# EAGLE board Breakout (EAGLE 7.4.0)
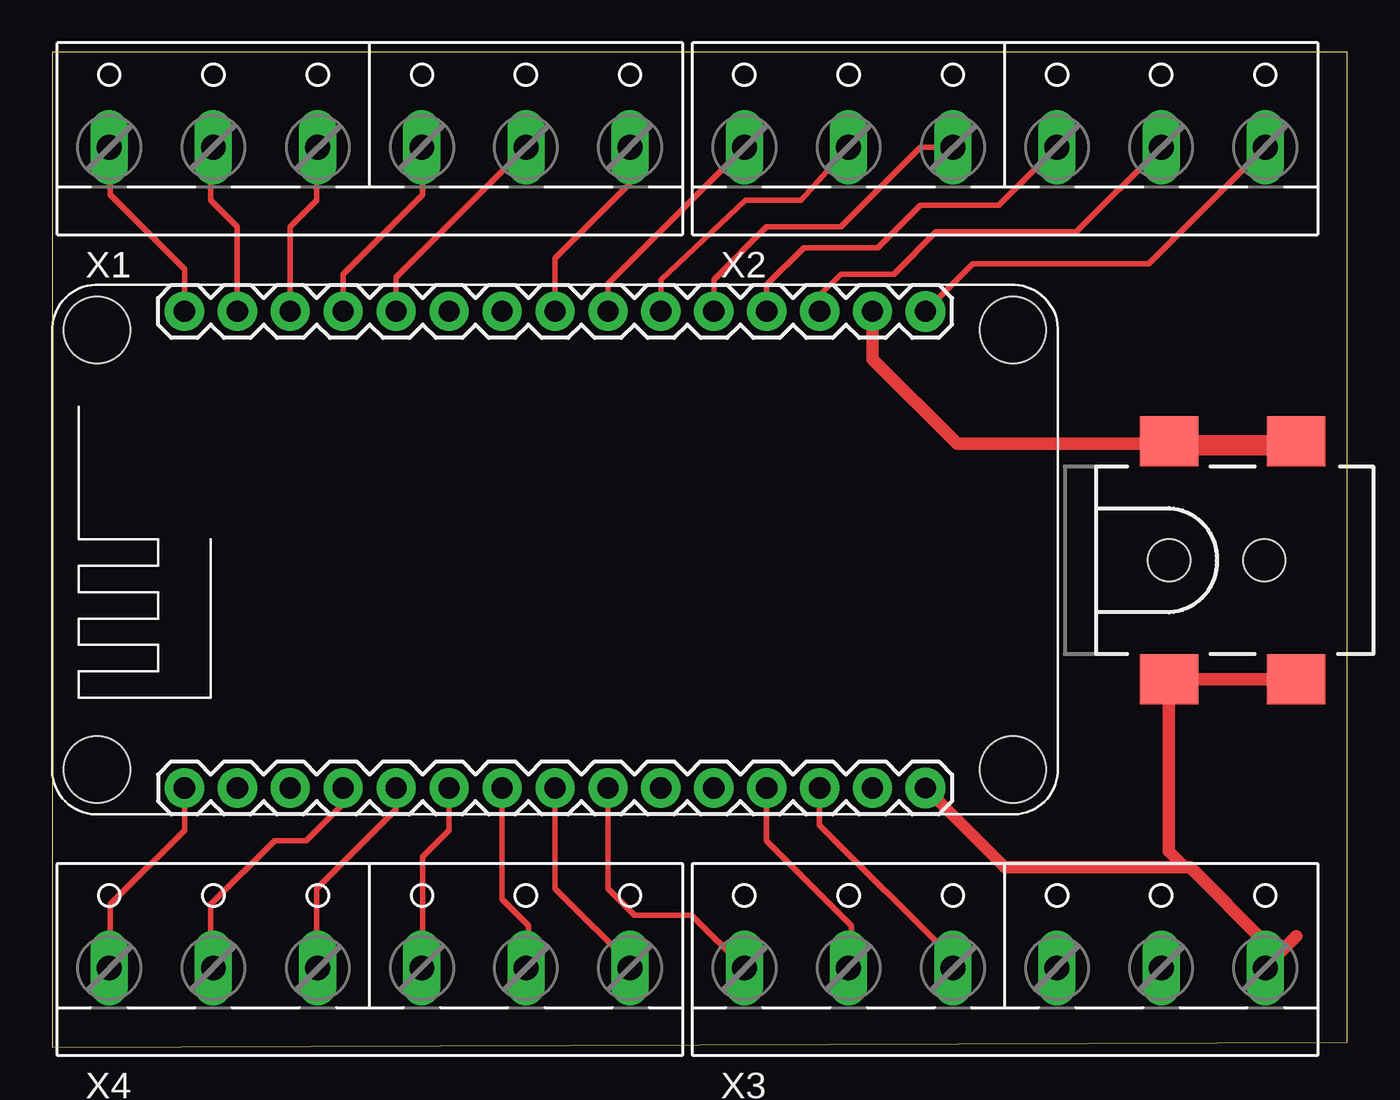
[diagram p0: board, top side]
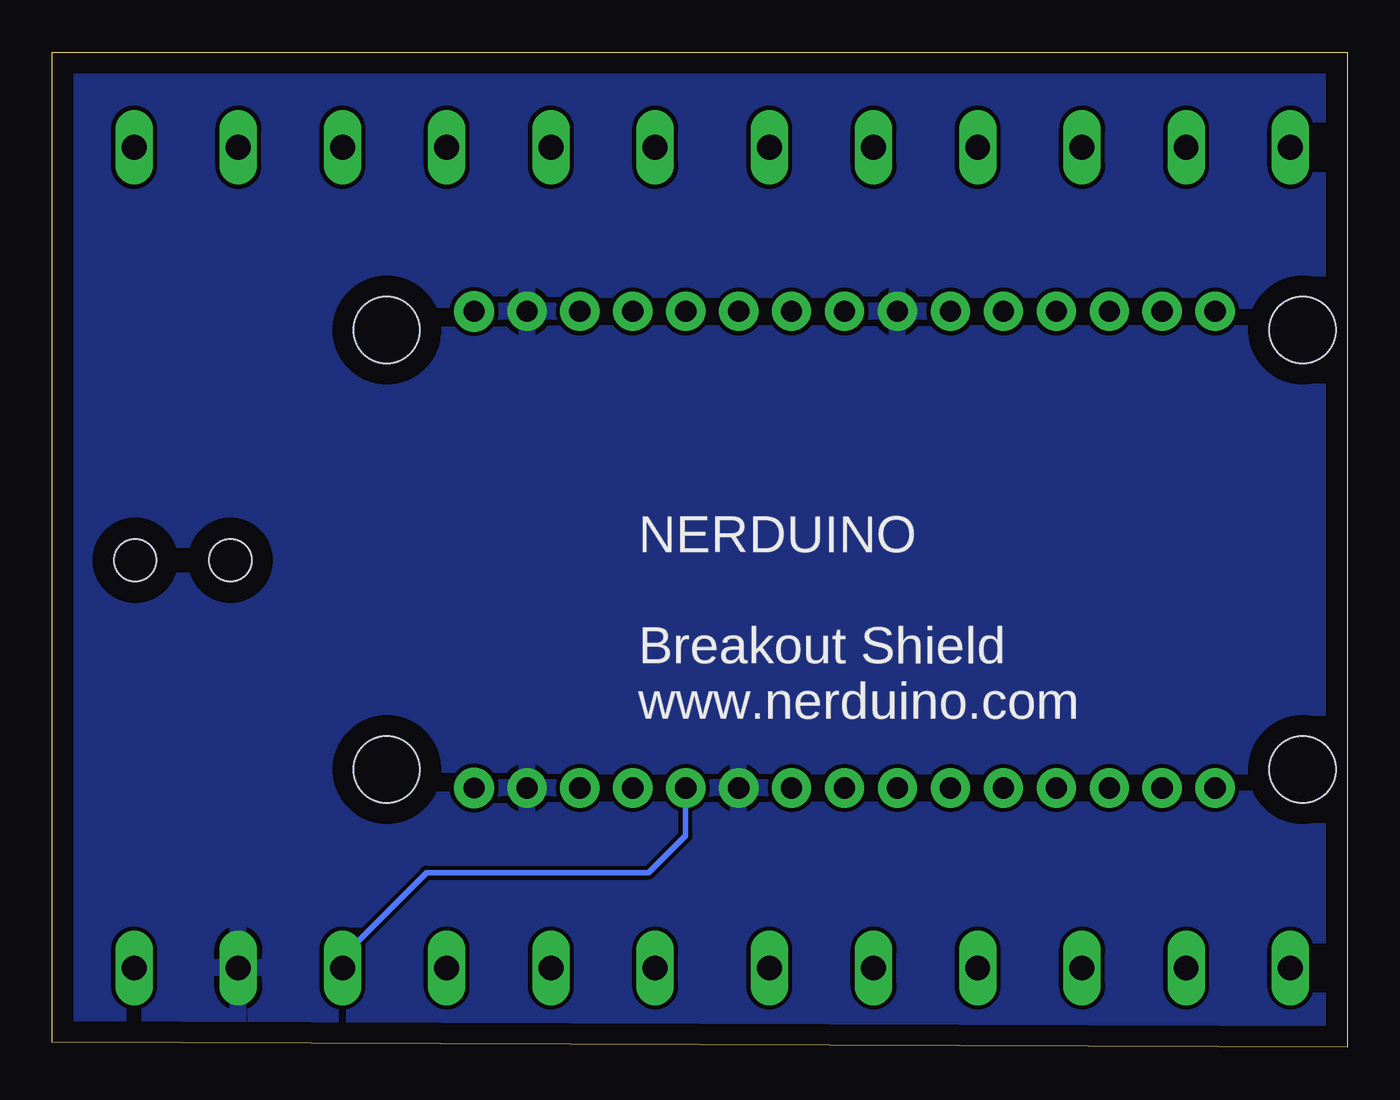
[diagram p1: board, bottom side, seen from below]

Size 62.15 x 47.74 mm. Coordinates in mm from the lower left corner, seen from the top.
Outline: 0,0 62.15,0.25 62.15,47.74 0,47.74 0,0
Copper layers (1*16): Top 0.035mm / dielectric 1.5mm / Bottom 0.035mm
Design rules "default": minimum track width 10mil, minimum drill 24mil, track to track 8mil, track to pad 8mil, pad to pad 8mil, via to via 8mil, smd to smd 8mil, copper to edge 40mil, drill to drill 8mil, minimum pad ring 10mil, minimum via ring 8mil, stop-mask expansion 4mil, vias tented up to drill 0mil, thermal gap 10mil

## Footprints (pad centres in the part's own frame; a part is rotated, then mirrored left to right if it is on the bottom)
POWER_JACK_SMD = smd 2.8 x 2.4: GND 0,-5.7; P$4 6.1,-5.7; VIN0 0,5.7; VIN1 6.1,5.7 | hole 2.032: 0,0; 4.572,0
NERDUINO_STACK = drill 1.016 pad 1.88: 1 -17.78,-5.08; 2 -15.24,-5.08; 3 -12.7,-5.08; 4 -10.16,-5.08; 5 -7.62,-5.08; 6 -5.08,-5.08; 7 -2.54,-5.08; 8 0,-5.08; 9 2.54,-5.08; 10 5.08,-5.08; 11 7.62,-5.08; 12 10.16,-5.08; 13 12.7,-5.08; 14 15.24,-5.08; 17 15.24,17.78; 18 12.7,17.78; 19 10.16,17.78; 20 7.62,17.78; 21 5.08,17.78; 22 2.54,17.78; 23 0,17.78; 24 -2.54,17.78; 25 -5.08,17.78; 26 -7.62,17.78; 27 -10.16,17.78; 28 -12.7,17.78; 29 -15.24,17.78; 30 -17.78,17.78 | drill 1 pad 1.93: 15 17.78,-5.08; 16 17.78,17.78 | hole 3.175: -21.971,16.891; -21.971,-4.191; 21.971,-4.191; 21.971,16.891
W237-6 = drill 1.194 long: 1 -12.5,-1.27; 2 -7.5,-1.27; 3 -2.5,-1.27; 4 2.5,-1.27; 5 7.5,-1.27; 6 12.5,-1.27

## Placement (x,y rotation side)
J1  POWER_JACKSMD  [POWER_JACK_SMD]  53.59,23.37 0 top
U$1  NERDSHIELD  [NERDUINO_STACK]  24.13,17.53 0 top
X1  [W237-6]  15.24,44.45 0 top
X2  [W237-6]  45.72,44.45 0 top
X3  [W237-6]  45.72,5.08 0 top
X4  [W237-6]  15.24,5.08 0 top

## Library data of the parts
J1 = SparkFun
U$1 = NerduinoShieldLib
X1-X4 = con-wago-500; OC_FARNELL: unknown; OC_NEWARK: unknown

## Nets
GND: J1.VIN0 U$1.10 U$1.14 U$1.17 U$1.24 X3.5
N$1: U$1.16 X2.6
N$2: U$1.18 X2.5
N$3: U$1.19 X2.4
N$4: U$1.20 X2.3
N$5: U$1.21 X2.2
N$6: U$1.22 X2.1
N$7: U$1.23 X1.6
N$8: U$1.26 X1.5
N$9: U$1.27 X1.4
N$10: U$1.28 X1.3
N$11: U$1.29 X1.2
N$12: U$1.30 X1.1
N$13: U$1.1 X4.1
N$14: U$1.4 X4.2
N$15: U$1.5 X4.3
N$16: U$1.6 X4.4
N$17: U$1.7 X4.5
N$18: U$1.8 X4.6
N$19: U$1.9 X3.1
N$20: U$1.12 X3.2
N$21: J1.P$4 U$1.15 X3.6
N$23: U$1.11 X3.4
N$26: U$1.13 X3.3

## Tracks (layer width: path | path; a pad name or v marks a point on that pad's centre or on a via)
GND
  Top 0.61: J1.VIN0 59.83,29.07 60.2,28.7 53.59,28.7 53.34,28.96 43.43,28.96 39.37,33.02 U$1.17
  pour Bottom: 0,48.26 62.23,48.26 62.23,0 0,0
N$1
  Top 0.254: U$1.16 44.2,37.59 52.63,37.59 X2.6
N$2
  Top 0.254: U$1.18 36.83,36.07 37.85,37.08 40.39,37.08 42.42,39.12 49.16,39.12 X2.5
N$3
  Top 0.254: U$1.19 34.29,36.58 36.07,38.35 39.62,38.35 41.66,40.39 45.43,40.39 X2.4
  Top 0.406: 48.26,43.18 X2.4
N$4
  Top 0.254: U$1.20 31.75,36.83 34.29,39.37 37.85,39.37 41.66,43.18 X2.3
N$5
  Top 0.254: U$1.21 29.21,36.83 33.27,40.64 35.93,40.64 X2.2
N$6
  Top 0.254: U$1.22 26.67,36.63 X2.1
N$7
  Top 0.254: U$1.23 24.13,37.85 27.69,41.4 27.69,43.13 X1.6
N$8
  Top 0.254: U$1.26 16.51,36.95 X1.5
N$9
  Top 0.254: U$1.27 13.97,37.08 17.78,40.89 17.78,43.14 X1.4
N$10
  Top 0.254: U$1.28 11.43,39.37 12.7,40.64 12.7,43.14 X1.3
N$11
  Top 0.254: U$1.29 8.89,39.37 7.62,40.64 7.62,43.06 X1.2
N$12
  Top 0.254: U$1.30 6.35,37.34 2.79,40.89 2.79,43.13 X1.1
N$13
  Top 0.254: U$1.1 6.35,10.41 2.79,6.86 2.79,3.81 2.54,3.56 2.54,3.61 X4.1
N$14
  Top 0.254: U$1.4 13.97,11.68 12.19,9.91 10.67,9.91 7.62,6.86 7.62,3.93 X4.2
N$15
  Top 0.254: U$1.5 16.51,11.43 12.7,7.62 12.7,3.85 X4.3
N$16
  Top 0.254: U$1.6 19.05,10.41 17.78,9.14 17.78,3.85 X4.4
N$17
  Top 0.254: U$1.7 21.59,7.11 22.86,5.84 22.86,3.93 X4.5
  Bottom 0.406: 22.86,3.81 X4.5
N$18
  Top 0.254: U$1.8 24.13,7.62 27.94,3.81 X4.6
N$19
  Top 0.254: U$1.9 26.67,7.62 27.94,6.35 30.68,6.35 X3.1
N$20
  Top 0.254: U$1.12 34.29,9.91 38.35,5.84 38.35,3.94 X3.2
N$21
  Top 0.61: 59.69,5.34 57.91,3.56 57.97,3.56 X3.6 58.22,5.03 54.61,8.64 54.36,8.64 | 54.36,8.64 45.72,8.64 U$1.15 | J1.P$4 53.71,17.67 53.59,17.78 53.59,9.4 54.36,8.64
N$23
  Bottom 0.254: X3.4 48.22,4.36 44.2,8.38 33.53,8.38 31.75,10.16 U$1.11
N$26
  Top 0.254: X3.3 43.22,4.28 36.83,10.67 U$1.13

## Text on the board
_bsilk: NERDUINO / / Breakout Shield / www.nerduino.com